# Altium PCB PCB_pami_groupie.PcbDoc
Units mil, origin at the board's own origin, x right, y up, seen from the top; angles counter-clockwise.
Board outline 6000 x 4000 mil, 2 copper layers (Top Layer, Bottom Layer); 21 components, 30 nets, 58 pads, 0 vias.
Unrouted connection lines stored in the file: 24.
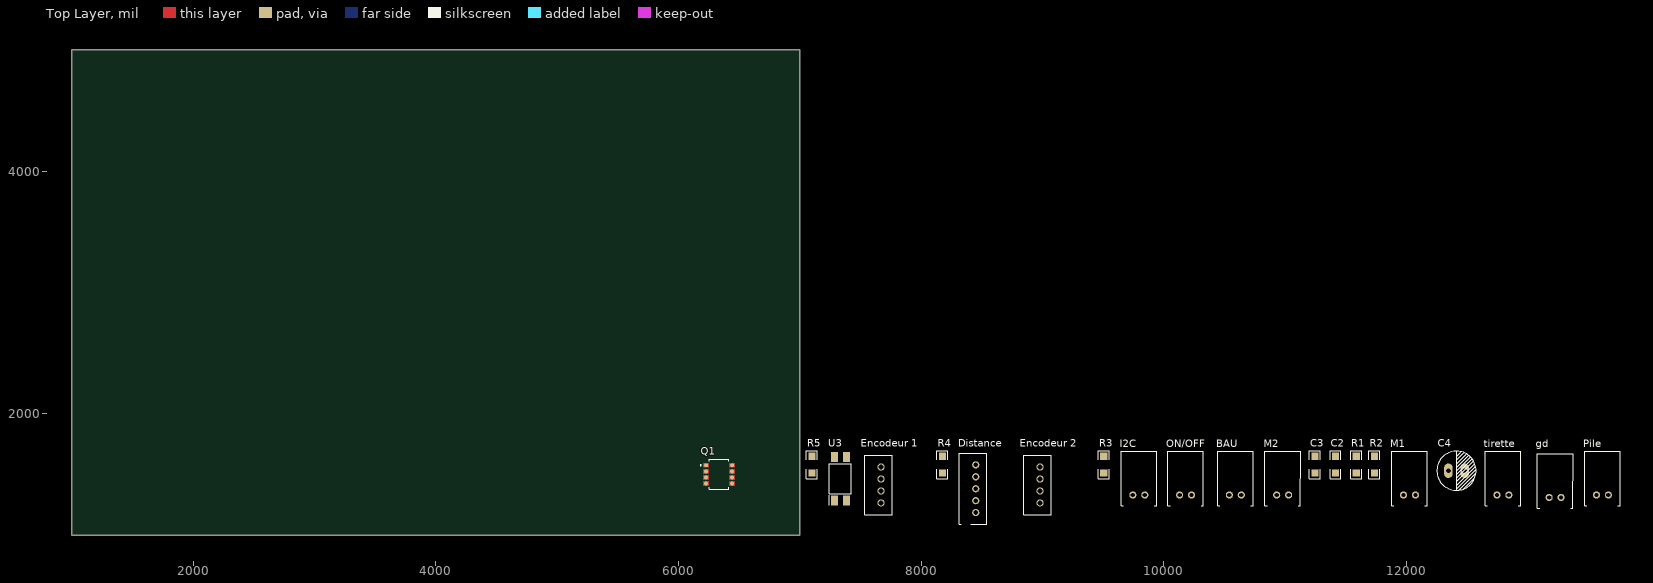
[diagram p0: Top Layer view]
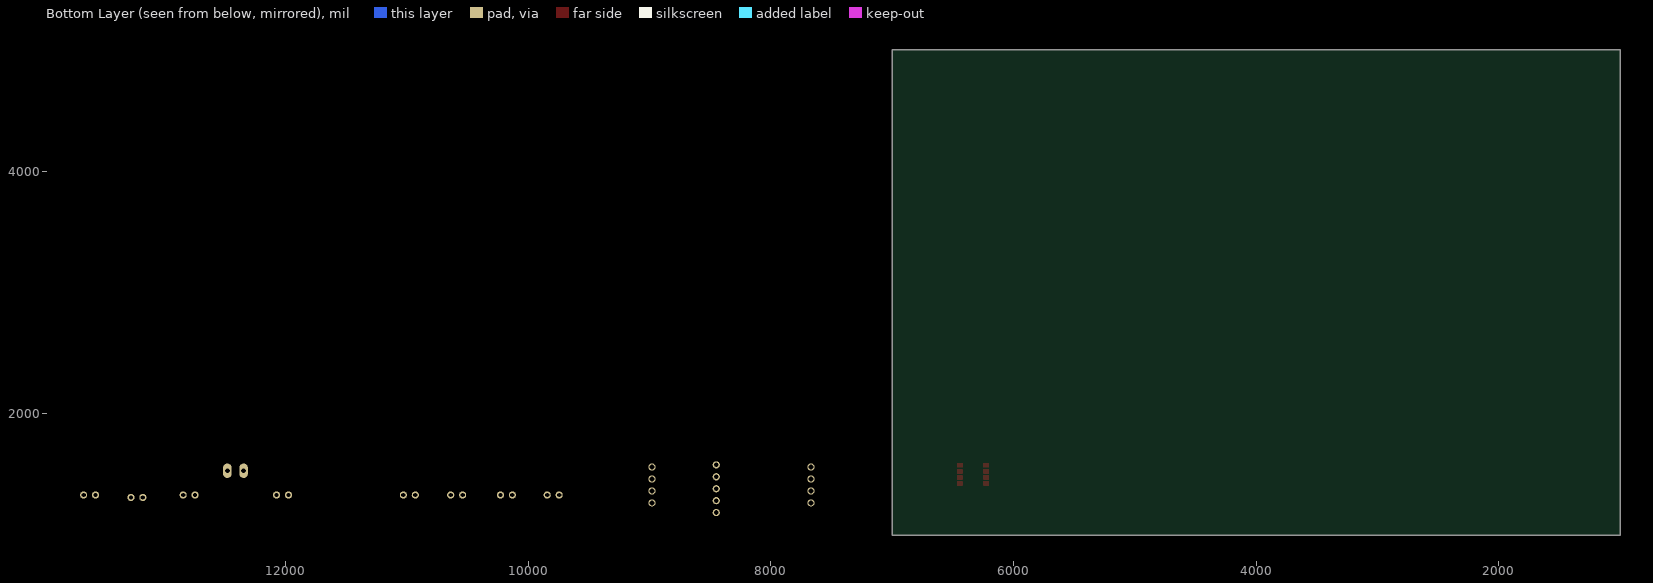
[diagram p1: Bottom Layer view, seen from below]

## Layer stack, top to bottom
Top Solder: solder mask 0.4, Solder Resist, Dk 3.5
Top Layer: signal copper 1.4
Dielectric 1: dielectric 12.6, FR-4, Dk 4.8
Bottom Layer: signal copper 1.4
Bottom Solder: solder mask 0.4, Solder Resist, Dk 3.5

## Board outline
1000,1000 7000,1000 7000,5000 1000,5000

## Design rules (kind name [scope] priority, off if disabled: settings)
Clearance [All] p1: gap=10 ignorepadtopadclearanceinfootprint=FALSE
PolygonConnect [All] p1: connectstyle=Relief reliefconductorwidth=10 reliefentries=4 polygonreliefangle="90 Angle" airgapwidth=10
RoutingVias [All] p1: holewidth=28 width=50 viastyle="Through Hole" minholewidth=28 minwidth=50 maxholewidth=28 maxwidth=50
SolderMaskExpansion [All] p1: expansion=4 istentingtop=FALSE
SupplyNets "Schematic Supply Nets_2" [InNet('GND')] p1: voltage=0.000
SupplyNets "Schematic Supply Nets_1" [InNet('3V')] p2: voltage=0.000
SupplyNets "Schematic Supply Nets" [InNet('VCC')] p3: voltage=0.000
Width [All] p1: maxlimit=10 minlimit=10 preferedwidth=10
30 further rules are at their usual default settings.

## Components (designator, comment, footprint, x,y, rotation, side; value= is the part's Value field where it differs from the comment)
BAU "" S2B-XH-A 10540,1330 r0 top
C2 "Cap" "Capacitor 1206" 11415,1580 r90 top value=1µF
C3 "Cap" "Capacitor 1206" 11245,1580 r90 top value=1µF
C4 "35V" Condensateur 12345,1530 r0 top value=100uF
Distance "Header 5" B5BXHAMLFSN 8450,1185 r90 top
"Encodeur 1" "" B4BXHALFSN 7670,1265 r90 top
"Encodeur 2" "" B4BXHALFSN 8980,1265 r90 top
gd "" S2B-XH-A 13175,1310 r0 top
I2C "" S2B-XH-A 9745,1330 r0 top
M1 "M1" S2B-XH-A 11975,1330 r0 top
M2 "M2" S2B-XH-A 10930,1330 r0 top
ON/OFF "" S2B-XH-A 10130,1330 r0 top
Pile "" S2B-XH-A 13565,1330 r0 top
Q1 "VOD213T" FP-VOD213T-MFG 6335,1500 r0 top
R1 "Res2" "Resistor 1206" 11585,1580 r90 top value=10K
R2 "Res2" "Resistor 1206" 11735,1580 r90 top value=10K
R3 "Res2" "Resistor 1206" 9505,1580 r90 top value=10K
R4 "Res2" "Resistor 1206" 8175,1580 r90 top value=10K
R5 "Res2" "Resistor 1206" 7100,1580 r90 top value=100
tirette "" S2B-XH-A 12745,1330 r0 top
U3 "FOD817S" SOP254P1016X385-4N 7335,1465 r90 top

## Footprints (in the part's own frame and the unit in brackets; to place one, negate y for a bottom-side part, rotate by r counter-clockwise, add the part's x,y. Pads: shape width x height; smd on the part's side, far side on the other; paste and mask are expansions set on the pad)
B4BXHALFSN [mm]
  round 1.5 hole 1: 1(0,0) 2(2.5,0) 3(5,0) 4(7.5,0)
  silkscreen extent -2.45,-2.35 9.95,3.4, body extent -2.45,-2.35 9.95,3.4, height 7.52
B5BXHAMLFSN [mm]
  round 1.5 hole 1: 1(0,0) 2(2.5,0) 3(5,0) 4(7.5,0) 5(10,0)
  round 0.65 hole 1.3 unplated: MH1(-1.6,2)
  silkscreen extent -2.45,-2.35 12.45,3.4, body extent -2.45,-2.36 12.45,3.39, height 6.92
"Capacitor 1206" [mm]
  rect 1.5x1.5 smd: 1(-1.75,0) 2(1.75,0)
  silkscreen extent -2.89,-1.14 2.89,1.14, body extent -1.98,-0.99 1.98,0.96, height 1.3
Condensateur [mil]
  oval 70x120 hole 40: 1(0,0) 2(133.86,0)
  silkscreen extent -94,-161 228,161, body extent -93,-160 227,160, height 500
FP-VOD213T-MFG [mm]
  round 0.819 smd paste+0 mask+0: 1(-2.73,1.905) 2(-2.73,0.635) 3(-2.734,-0.635) 4(-2.734,-1.905) 5(2.73,-1.905) 6(2.73,-0.635) 7(2.734,0.635) 8(2.734,1.905)
  Top Layer region: 3.3,1.45 2.29,1.45 2.24,1.46 2.198,1.488 2.17,1.53 2.16,1.58 2.16,1.58 2.16,2.23 2.17,2.28 2.198,2.322 2.24,2.35 2.29,2.36 2.29,2.36 3.3,2.36
  Top Layer region: 3.3,0.18 2.29,0.18 2.24,0.19 2.198,0.218 2.17,0.26 2.16,0.31 2.16,0.31 2.16,0.96 2.17,1.01 2.198,1.052 2.24,1.08 2.29,1.09 2.29,1.09 3.3,1.09
  Top Layer region: 3.3,-1.09 2.29,-1.09 2.24,-1.08 2.198,-1.052 2.17,-1.01 2.16,-0.96 2.16,-0.96 2.16,-0.31 2.17,-0.26 2.198,-0.218 2.24,-0.19 2.29,-0.18 2.29,-0.18 3.3,-0.18
  Top Layer region: 3.3,-2.36 2.29,-2.36 2.24,-2.35 2.198,-2.322 2.17,-2.28 2.16,-2.23 2.16,-2.23 2.16,-1.58 2.17,-1.53 2.198,-1.488 2.24,-1.46 2.29,-1.45 2.29,-1.45 3.3,-1.45
  Top Layer region: -3.3,-1.45 -2.29,-1.45 -2.24,-1.46 -2.198,-1.488 -2.17,-1.53 -2.16,-1.58 -2.16,-1.58 -2.16,-2.23 -2.17,-2.28 -2.198,-2.322 -2.24,-2.35 -2.29,-2.36 -2.29,-2.36 -3.3,-2.36
  Top Layer region: -3.3,-0.18 -2.29,-0.18 -2.24,-0.19 -2.198,-0.218 -2.17,-0.26 -2.16,-0.31 -2.16,-0.31 -2.16,-0.96 -2.17,-1.01 -2.198,-1.052 -2.24,-1.08 -2.29,-1.09 -2.29,-1.09 -3.3,-1.09
  Top Layer region: -3.3,1.09 -2.29,1.09 -2.24,1.08 -2.198,1.052 -2.17,1.01 -2.16,0.96 -2.16,0.96 -2.16,0.31 -2.17,0.26 -2.198,0.218 -2.24,0.19 -2.29,0.18 -2.29,0.18 -3.3,0.18
  Top Layer region: -3.3,2.36 -2.29,2.36 -2.24,2.35 -2.198,2.322 -2.17,2.28 -2.16,2.23 -2.16,2.23 -2.16,1.58 -2.17,1.53 -2.198,1.488 -2.24,1.46 -2.29,1.45 -2.29,1.45 -3.3,1.45
  silkscreen extent -3.94,-3.14 2.02,3.14, body extent -3.4,-3.23 3.4,3.23, height 0.25
"Resistor 1206" [mm]
  rect 1.5x1.5 smd: 1(-1.75,0) 2(1.75,0)
  silkscreen extent -2.89,-1.14 2.89,1.14, body extent -1.98,-0.95 1.98,0.93, height 0.55
S2B-XH-A [mm]
  round 1.5 hole 0.9: 1(0,0) 2(2.5,0)
  silkscreen extent -2.45,-2.26 5,9.14, body extent -2.41,-2.32 4.99,9.18, height 6.15
SOP254P1016X385-4N [mm]
  rect 2.1x1.5 smd: 1(-4.55,1.27) 2(-4.55,-1.27) 3(4.55,-1.27) 4(4.55,1.27)
  silkscreen extent -5.6,-2.3 3.15,2.37, body extent -5.08,-2.3 5.08,2.3, height 3.85

## Part data
BAU gd I2C M1 M2 ON/OFF Pile tirette: library part "Header 2H", "Header, 2-Pin, Right Angle", LatestRevisionDate=17-Jul-2002, LatestRevisionNote="Re-released for DXP Platform.", Publisher="Altium Limited"
C2 C3: "Capacitor", LatestRevisionDate=17-Jul-2002, LatestRevisionNote="Re-released for DXP Platform.", PackageDescription="Radial Cap, Thru-Hole; 2 Leads; 0.3 in Pin Spacing", PackageReference=RAD-0.3, Published=8-Jun-2000, Publisher="Altium Limited"
C4: library part "Cap Pol1", "Polarized Capacitor (Radial)", LatestRevisionDate=17-Jul-2002, LatestRevisionNote="Re-released for DXP Platform.", PackageDescription="Polarized Capacitor (Radial); 2 Leads", PackageReference=RB7.6-15, Published=8-Jun-2000, Publisher="Altium Limited"
Distance: "Header, 5-Pin", LatestRevisionDate=17-Jul-2002, LatestRevisionNote="Re-released for DXP Platform.", Publisher="Altium Limited"
"Encodeur 1" "Encodeur 2": library part "Header 4H", "Header, 4-Pin, Right Angle", LatestRevisionDate=17-Jul-2002, LatestRevisionNote="Re-released for DXP Platform.", Publisher="Altium Limited"
Q1: library part CMP-00030-18818872-1, "VOD213T Optocoupler DC-IN 2-CH Transistor DC-OUT 8-Pin SOIC T/R", Ambient Temperature Range High=100°C, Case/Package=SOIC, Collector Emitter Breakdown Voltage=70V, Collector Emitter Saturation Voltage=400mV, Forward Current=30mA, Forward Voltage=1.2V, Input Current=10mA, Isolation Voltage=4kV, Max Collector Current=50mA, Max Power Dissipation=300mW, Min Operating Temperature=-40°C, Reverse Breakdown Voltage=6V, Collector Emitter Voltage (VCEO)=70V, Fall Time=4µs, Height=3.5mm, Max Input Current=30mA, Max Operating Temperature=100°C, Max Output Voltage=70V, Mount="Surface Mount", NexarPartId=18818872, Number of Channels=2, Number of Elements=2, Number of Pins=8, Output Current per Channel=50mA, Output Voltage=70V, Packaging="Tape & Reel (TR)", Power Dissipation=300mW, Radiation Hardening=No, REACH SVHC=Unknown, Reverse Voltage=6V, Rise Time=5µs, RoHS=Compliant, Schedule B="8541408000, 8541408000", Turn-Off Delay Time=4µs, Turn-On Delay Time=5µs
R1 R2 R3 R4 R5: "Resistor", LatestRevisionDate=17-Jul-2002, LatestRevisionNote="Re-released for DXP Platform.", PackageDescription="Axial Device, Thru-Hole; 2 Leads; 0.4 in Pin Spacing", PackageReference=AXIAL-0.4, Published=8-Jun-2000, Publisher="Altium Limited"
U3: library part Optoisolator1, "4-Pin Phototransistor Optocoupler", DatasheetVersion=Nov-2003, LatestRevisionDate=04-Mar-2005, LatestRevisionNote="Sch pins 3 & 4 Swapped.", PackageReference=DIP-4, Published=24-Mar-1999, Publisher="Altium Limited"

## Nets (pads, with @x,y where several pads share a name; then routed paths per layer and width w, separated by ;. In a path a pad name is that pad's centre, name@x,y a point inside that pad or via, vN(x,y) a via of type N, cw(c..) or ccw(c..) an arc to the next point about the centre after c; other vN are vias at no path point)
3V: Distance.5 gd.1 R3.2 R4.2 tirette.2
"enable 2": 
enable_1: 
GND: "Encodeur 1.2" "Encodeur 2.2" C2.1 C3.1 C4.2 Distance.4 Pile.2 Q1.4 Q1.5 R1.1 R2.1
I2C_INT: Distance.3
I2C_LPN: Distance.1
I2C_RST: Distance.2
I2C_SCL: I2C.2
I2C_SDA: I2C.1
NetBAU_1: BAU.1 ON/OFF.1
NetBAU_2: BAU.2
NetC4_1: C4.1 Pile.1
"NetEncodeur 1_3": "Encodeur 1.3"
"NetEncodeur 1_4": "Encodeur 1.4"
"NetEncodeur 2_3": "Encodeur 2.3"
"NetEncodeur 2_4": "Encodeur 2.4"
NetM1_1: M1.1
NetM1_2: M1.2
NetM2_1: M2.1
NetM2_2: M2.2
num_robot: R3.1
num_robot2: R4.1
"Sens1 M1": 
"Sens1 M2": 
"Sens2 M1": 
"Sens2 M2": 
switch_gd: C2.2 gd.2 R2.2
tirette: C3.2 R1.2 tirette.1
VCC: "Encodeur 1.1" "Encodeur 2.1" ON/OFF.2 R5.2
Vout: Q1.6 R5.1
pads on no net: Distance.MH1 Q1.1 Q1.2 Q1.3 Q1.7 Q1.8 U3.1 U3.2 U3.3 U3.4